# EAGLE board GrapherBlank5 (EAGLE 5.10), part 1 of 2
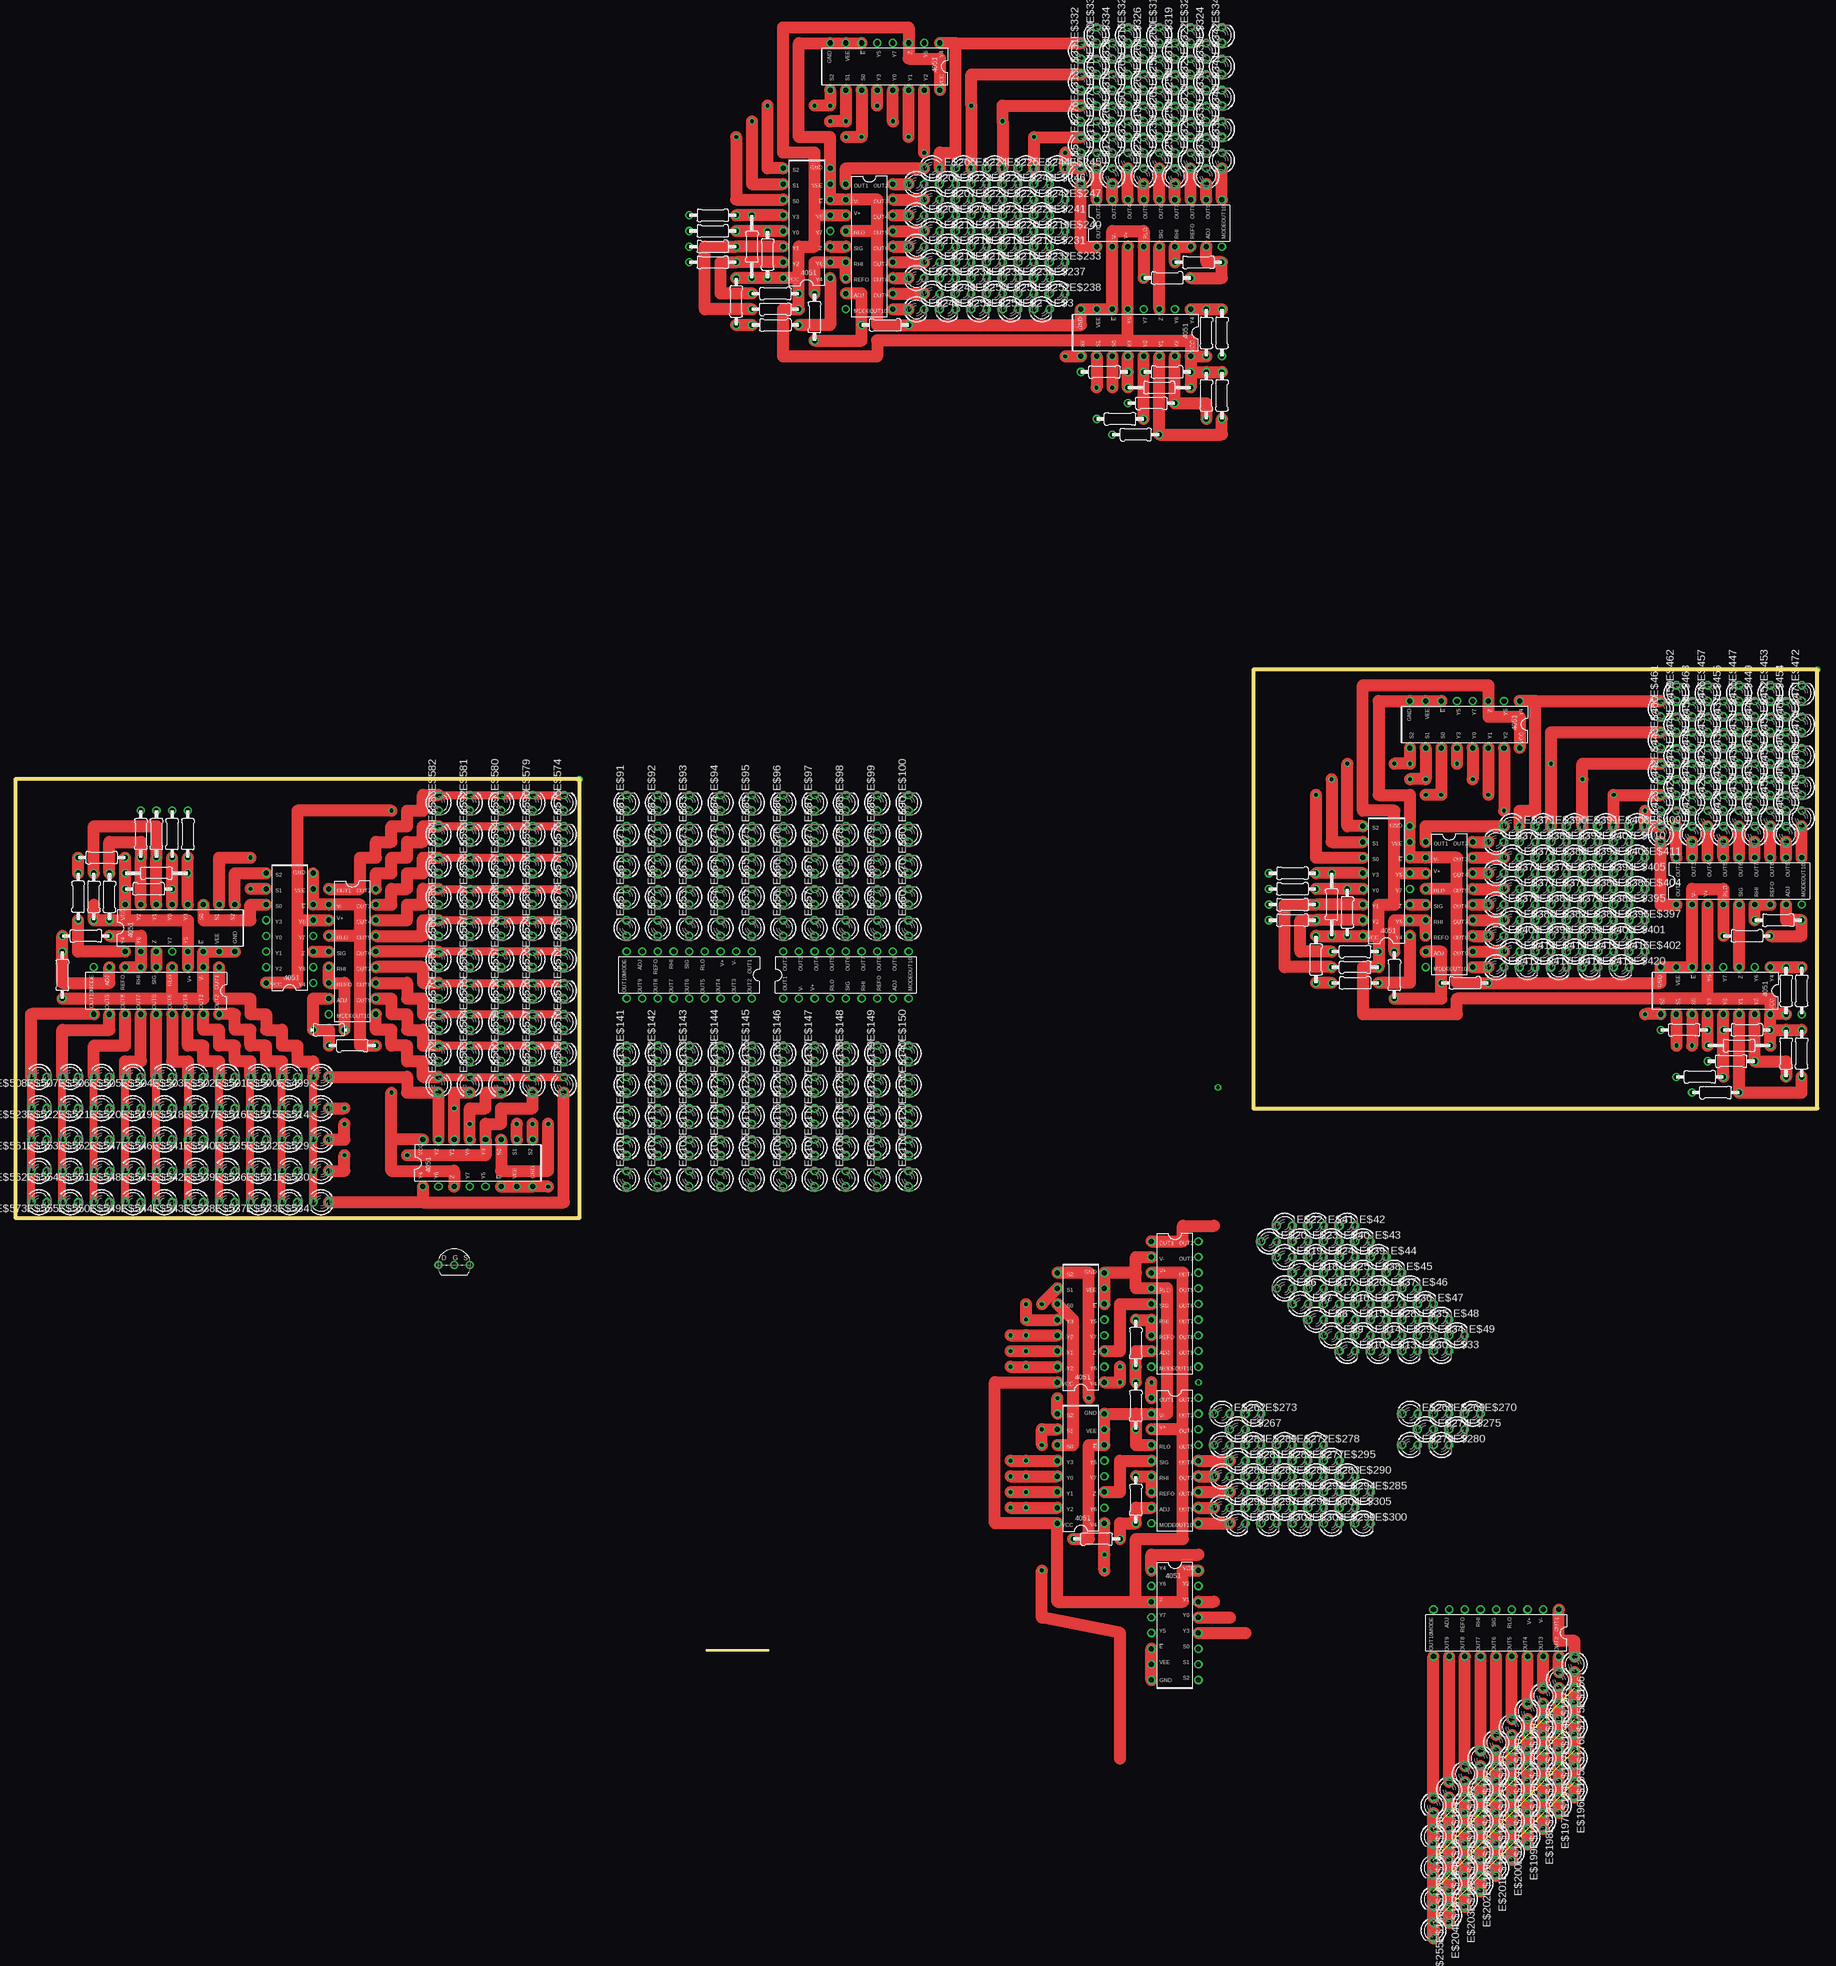
[diagram p0: board, top side]
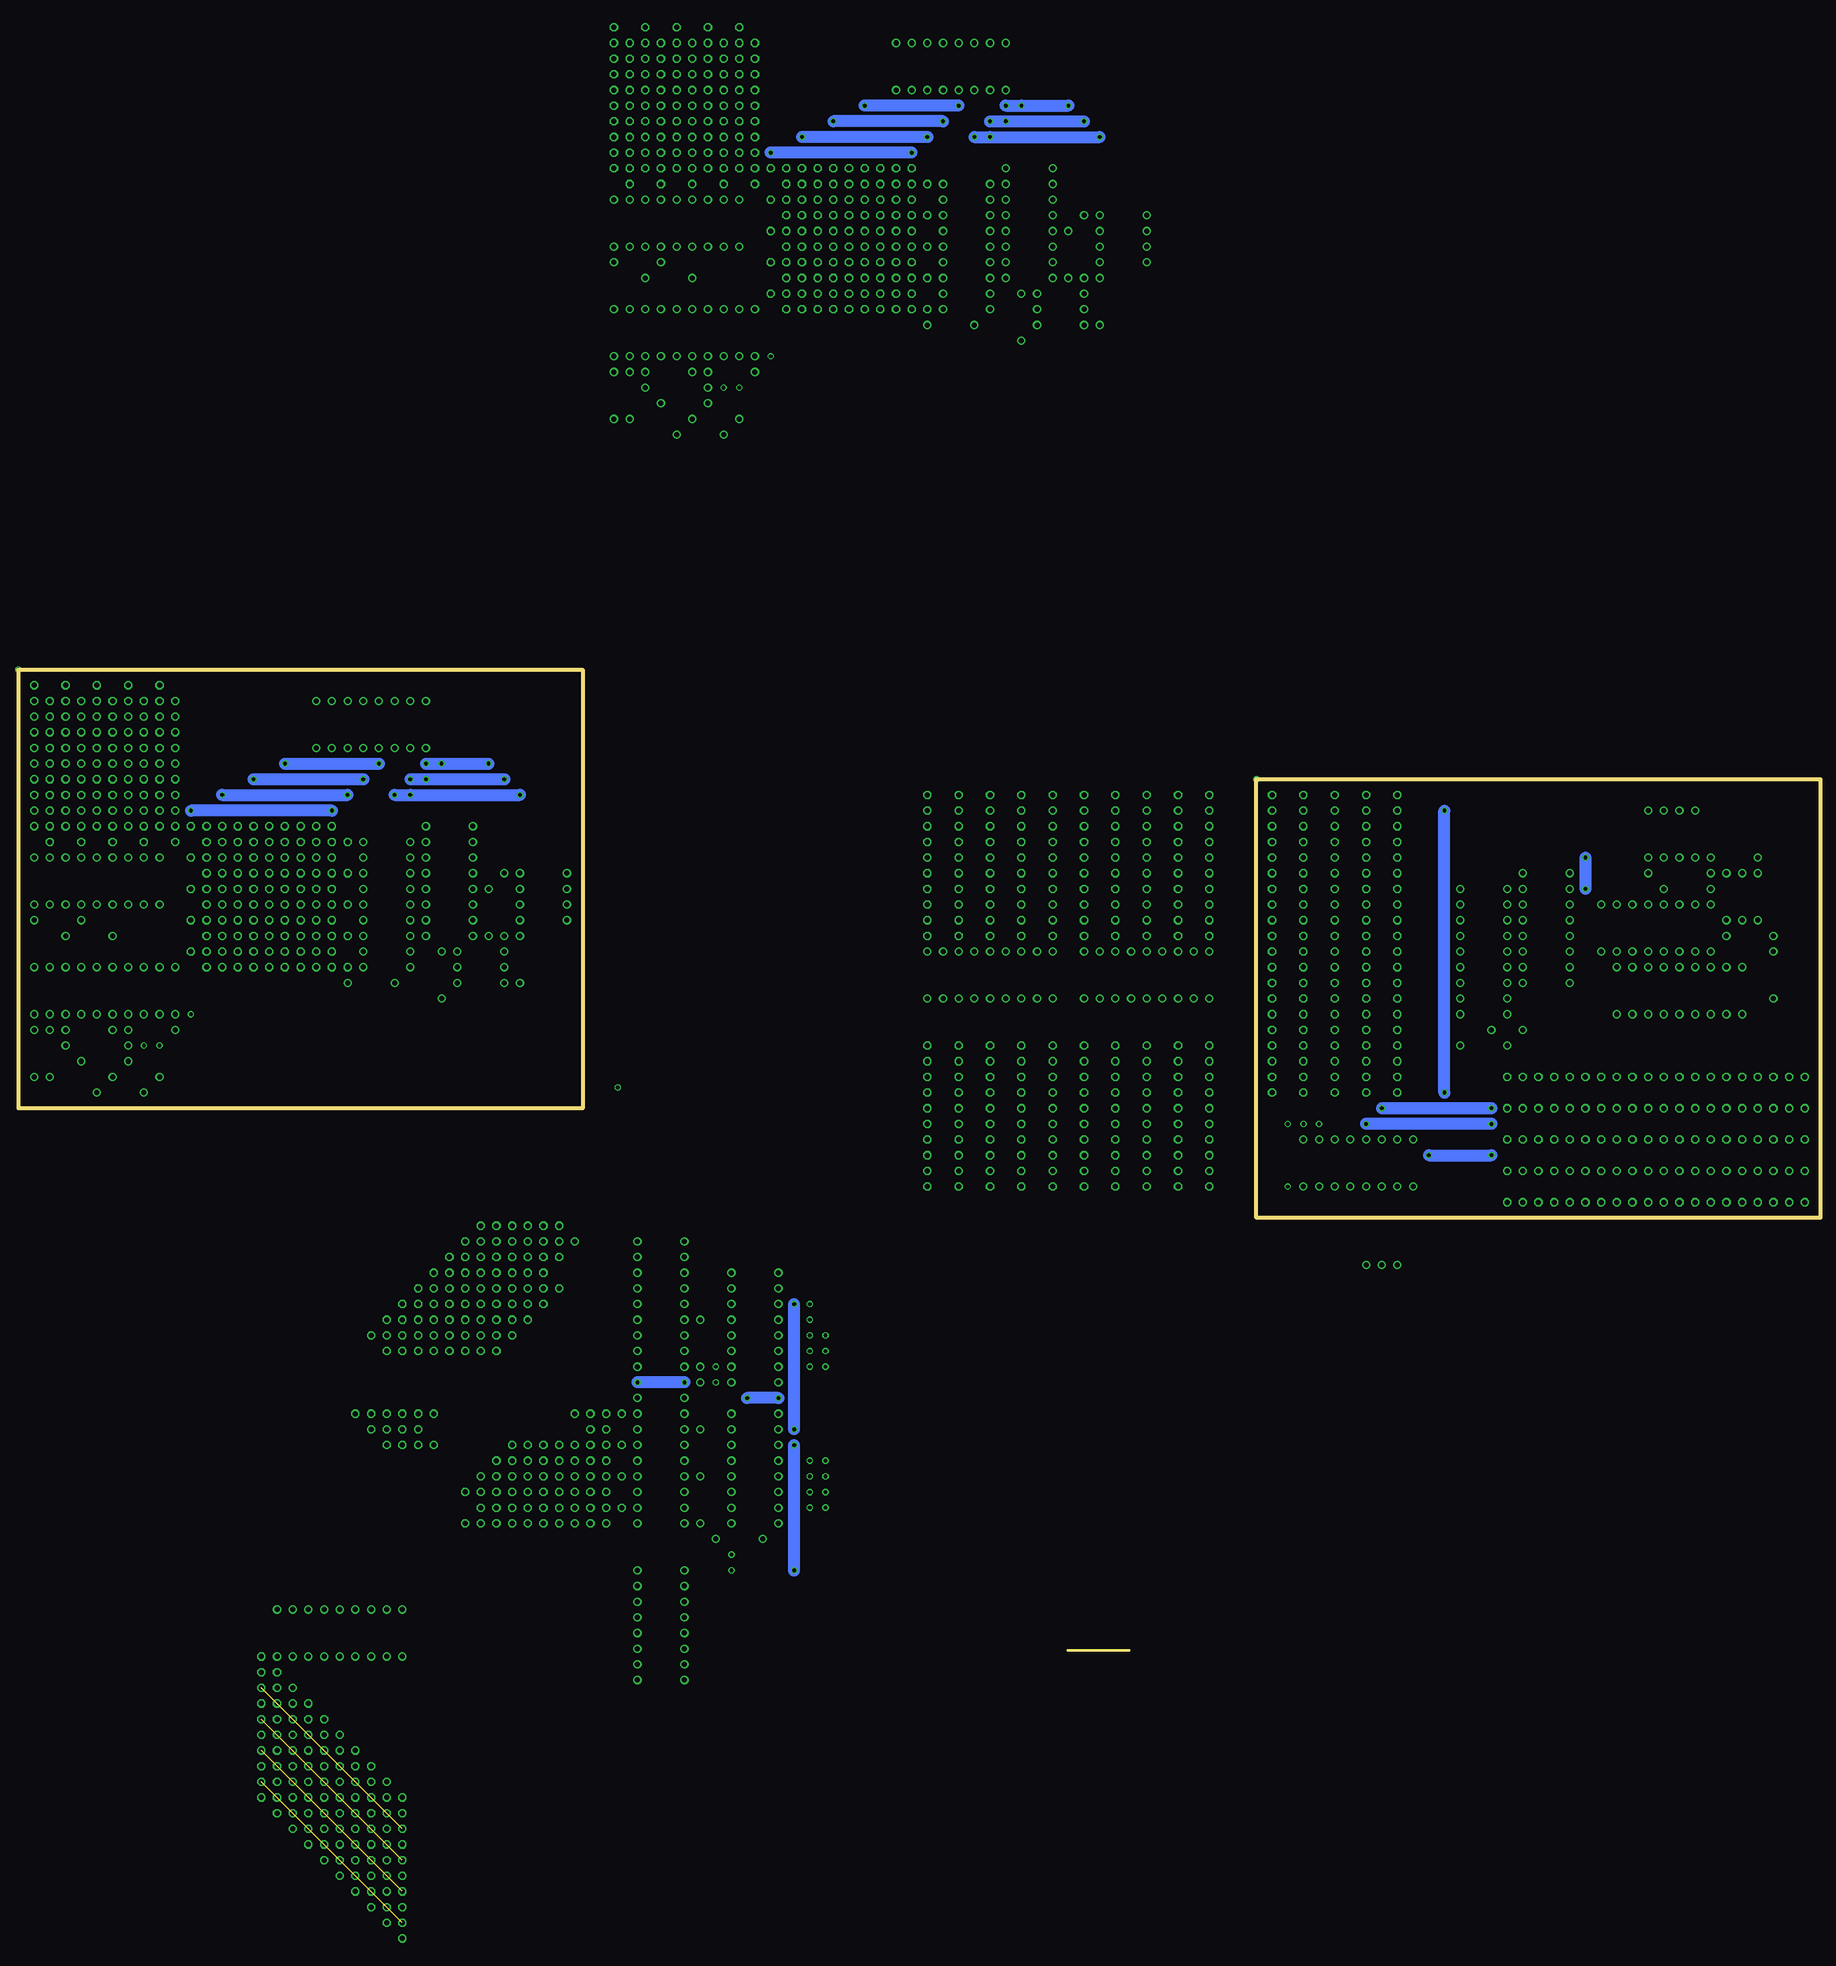
[diagram p1: board, bottom side, seen from below]

Size 292.1 x 88.9 mm. Coordinates in mm from the lower left corner, seen from the top.
Outline: 91.44,0 91.44,71.12 0,71.12 0,0 91.44,0
Outline: 292.1,17.78 292.1,88.9 200.66,88.9 200.66,17.78 292.1,17.78
Copper layers (1*16): Top 0.035mm / dielectric 1.5mm / Bottom 0.035mm
Design rules "default": minimum track width 10mil, minimum drill 24mil, track to track 8mil, track to pad 8mil, pad to pad 8mil, via to via 8mil, smd to smd 8mil, copper to edge 40mil, drill to drill 8mil, minimum pad ring 10mil, minimum via ring 8mil, stop-mask expansion 4mil, vias tented up to drill 0mil, thermal gap 10mil
Milling: 1 lines

## Footprints (pad centres in the part's own frame; a part is rotated, then mirrored left to right if it is on the bottom)
LM3914-10LED-BARGRAPH = drill 0.813 round: 1!R -3.81,1.27; 1!S -3.81,3.81; 1Q 3.81,1.27; 2!R -3.81,-3.81; 2!S -3.81,-6.35; 2Q 3.81,-8.89; 2Q1 3.81,-11.43; 2Q3 -3.81,-11.43; 3!R 3.81,-1.27; 3!S 3.81,-3.81; 3Q 3.81,-6.35; 4!R 3.81,3.81; 4!S 3.81,6.35; 4Q -3.81,8.89; GND -3.81,-8.89; NC -3.81,6.35; OE -3.81,-1.27; VCC 3.81,8.89
LED3MM = drill 0.813 octagon: A -1.27,0; K 1.27,0
RESISTOR = drill 0.813 round: IN1 -3.81,0; IN2 3.81,0
4051-ANALOG-MUX = drill 0.813 round: CLOCK 3.81,-6.35; GND -3.81,-8.89; Q0 3.81,-8.89; Q1 -3.81,-6.35; Q2 -3.81,-3.81; Q3 -3.81,-1.27; Q4 -3.81,3.81; Q5 -3.81,6.35; Q6 -3.81,1.27; Q7 3.81,1.27; Q8 3.81,-1.27; Q9 3.81,3.81; Q10 3.81,6.35; Q11 -3.81,8.89; RESET 3.81,-3.81; VCC 3.81,8.89
RESISTOR-L2 = drill 0.813 round: IN1 -5.08,0; IN2 5.08,0
RESISTOR-S2 = drill 0.813 round: IN1 -2.54,0; IN2 2.54,0
TRANSISTOR = drill 0.8 round: P$1 0,0; P$2 2.54,0; P$3 -2.54,0

## Placement (x,y rotation side)
E$1  [LM3914-10LED-BARGRAPH]  187.96,-12.7 0 top  (outside the outline)
E$2  [LED3MM]  not placed on the board
E$3  [LED3MM]  not placed on the board
E$4  [LM3914-10LED-BARGRAPH]  184.15,161.29 90 top  (outside the outline)
E$5  [LED3MM]  172.72,168.91 90 top  (outside the outline)
E$6  [LED3MM]  not placed on the board
E$7  [LED3MM]  not placed on the board
E$8  [LED3MM]  not placed on the board
E$9  [LED3MM]  not placed on the board
E$10  [LED3MM]  not placed on the board
E$11  [LED3MM]  175.26,171.45 90 top  (outside the outline)
E$12  [LED3MM]  177.8,168.91 90 top  (outside the outline)
E$13  [LED3MM]  not placed on the board
E$14  [LED3MM]  not placed on the board
E$15  [LED3MM]  not placed on the board
E$16  [LED3MM]  not placed on the board
E$17  [LED3MM]  not placed on the board
E$18  [LED3MM]  not placed on the board
E$19  [LED3MM]  not placed on the board
E$20  [LED3MM]  not placed on the board
E$21  [RESISTOR]  129.54,146.05 90 top  (outside the outline)
E$22  [LED3MM]  205.74,-1.27 0 top
E$23  [LED3MM]  not placed on the board
E$24  [LED3MM]  not placed on the board
E$25  [LED3MM]  not placed on the board
E$26  [LED3MM]  not placed on the board
E$27  [LED3MM]  not placed on the board
E$28  [LED3MM]  not placed on the board
E$29  [LED3MM]  not placed on the board
E$30  [LED3MM]  not placed on the board
E$31  [RESISTOR]  140.97,144.78 180 top  (outside the outline)
E$32  [LED3MM]  180.34,171.45 90 top  (outside the outline)
E$33  [LED3MM]  not placed on the board
E$34  [LED3MM]  not placed on the board
E$35  [LED3MM]  not placed on the board
E$36  [LED3MM]  not placed on the board
E$37  [LED3MM]  not placed on the board
E$38  [LED3MM]  not placed on the board
E$39  [LED3MM]  not placed on the board
E$40  [LED3MM]  not placed on the board
E$41  [LED3MM]  210.82,-1.27 0 top
E$42  [LED3MM]  215.9,-1.27 0 top
E$43  [LED3MM]  not placed on the board
E$44  [LED3MM]  not placed on the board
E$45  [LED3MM]  not placed on the board
E$46  [LED3MM]  not placed on the board
E$47  [LED3MM]  not placed on the board
E$48  [LED3MM]  not placed on the board
E$49  [LED3MM]  not placed on the board
E$50  [LED3MM]  not placed on the board
E$51  [LED3MM]  99.06,46.99 90 top
E$52  [LED3MM]  104.14,46.99 90 top
E$53  [LED3MM]  109.22,46.99 90 top
E$54  [LED3MM]  114.3,46.99 90 top
E$55  [LED3MM]  119.38,46.99 90 top
E$56  [LED3MM]  124.46,46.99 90 top
E$57  [LED3MM]  129.54,46.99 90 top
E$58  [LED3MM]  134.62,46.99 90 top
E$59  [LED3MM]  139.7,46.99 90 top
E$60  [LED3MM]  144.78,46.99 90 top
E$61  [LED3MM]  99.06,52.07 90 top
E$62  [LED3MM]  104.14,52.07 90 top
E$63  [LED3MM]  109.22,52.07 90 top
E$64  [LED3MM]  114.3,52.07 90 top
E$65  [LED3MM]  119.38,52.07 90 top
E$66  [LED3MM]  124.46,52.07 90 top
E$67  [LED3MM]  129.54,52.07 90 top
E$68  [LED3MM]  134.62,52.07 90 top
E$69  [LED3MM]  139.7,52.07 90 top
E$70  [LED3MM]  144.78,52.07 90 top
E$71  [LED3MM]  99.06,57.15 90 top
E$72  [LED3MM]  104.14,57.15 90 top
E$73  [LED3MM]  109.22,57.15 90 top
E$74  [LED3MM]  114.3,57.15 90 top
E$75  [LED3MM]  119.38,57.15 90 top
E$76  [LED3MM]  124.46,57.15 90 top
E$77  [LED3MM]  129.54,57.15 90 top
E$78  [LED3MM]  134.62,57.15 90 top
E$79  [LED3MM]  139.7,57.15 90 top
E$80  [LED3MM]  144.78,57.15 90 top
E$81  [LED3MM]  99.06,62.23 90 top
E$82  [LED3MM]  104.14,62.23 90 top
E$83  [LED3MM]  109.22,62.23 90 top
E$84  [LED3MM]  114.3,62.23 90 top
E$85  [LED3MM]  119.38,62.23 90 top
E$86  [LED3MM]  124.46,62.23 90 top
E$87  [LED3MM]  129.54,62.23 90 top
E$88  [LED3MM]  134.62,62.23 90 top
E$89  [LED3MM]  139.7,62.23 90 top
E$90  [LED3MM]  144.78,62.23 90 top
E$91  [LED3MM]  99.06,67.31 90 top
E$92  [LED3MM]  104.14,67.31 90 top
E$93  [LED3MM]  109.22,67.31 90 top
E$94  [LED3MM]  114.3,67.31 90 top
E$95  [LED3MM]  119.38,67.31 90 top
E$96  [LED3MM]  124.46,67.31 90 top
E$97  [LED3MM]  129.54,67.31 90 top
E$98  [LED3MM]  134.62,67.31 90 top
E$99  [LED3MM]  139.7,67.31 90 top
E$100  [LED3MM]  144.78,67.31 90 top
E$101  [LED3MM]  99.06,6.35 90 top
E$102  [LED3MM]  104.14,6.35 90 top
E$103  [LED3MM]  109.22,6.35 90 top
E$104  [LED3MM]  114.3,6.35 90 top
E$105  [LED3MM]  119.38,6.35 90 top
E$106  [LED3MM]  124.46,6.35 90 top
E$107  [LED3MM]  129.54,6.35 90 top
E$108  [LED3MM]  134.62,6.35 90 top
E$109  [LED3MM]  139.7,6.35 90 top
E$110  [LED3MM]  144.78,6.35 90 top
E$111  [LED3MM]  99.06,11.43 90 top
E$112  [LED3MM]  104.14,11.43 90 top
E$113  [LED3MM]  109.22,11.43 90 top
E$114  [LED3MM]  114.3,11.43 90 top
E$115  [LED3MM]  119.38,11.43 90 top
E$116  [LED3MM]  124.46,11.43 90 top
E$117  [LED3MM]  129.54,11.43 90 top
E$118  [LED3MM]  134.62,11.43 90 top
E$119  [LED3MM]  139.7,11.43 90 top
E$120  [LED3MM]  144.78,11.43 90 top
E$121  [LED3MM]  99.06,16.51 90 top
E$122  [LED3MM]  104.14,16.51 90 top
E$123  [LED3MM]  109.22,16.51 90 top
E$124  [LED3MM]  114.3,16.51 90 top
E$125  [LED3MM]  119.38,16.51 90 top
E$126  [LED3MM]  124.46,16.51 90 top
E$127  [LED3MM]  129.54,16.51 90 top
E$128  [LED3MM]  134.62,16.51 90 top
E$129  [LED3MM]  139.7,16.51 90 top
E$130  [LED3MM]  144.78,16.51 90 top
E$131  [LED3MM]  99.06,21.59 90 top
E$132  [LED3MM]  104.14,21.59 90 top
E$133  [LED3MM]  109.22,21.59 90 top
E$134  [LED3MM]  114.3,21.59 90 top
E$135  [LED3MM]  119.38,21.59 90 top
E$136  [LED3MM]  124.46,21.59 90 top
E$137  [LED3MM]  129.54,21.59 90 top
E$138  [LED3MM]  134.62,21.59 90 top
E$139  [LED3MM]  139.7,21.59 90 top
E$140  [LED3MM]  144.78,21.59 90 top
E$141  [LED3MM]  99.06,26.67 90 top
E$142  [LED3MM]  104.14,26.67 90 top
E$143  [LED3MM]  109.22,26.67 90 top
E$144  [LED3MM]  114.3,26.67 90 top
E$145  [LED3MM]  119.38,26.67 90 top
E$146  [LED3MM]  124.46,26.67 90 top
E$147  [LED3MM]  129.54,26.67 90 top
E$148  [LED3MM]  134.62,26.67 90 top
E$149  [LED3MM]  139.7,26.67 90 top
E$150  [LED3MM]  144.78,26.67 90 top
E$151  [LM3914-10LED-BARGRAPH]  133.35,39.37 90 top
E$152  [LM3914-10LED-BARGRAPH]  110.49,39.37 270 top
E$153  [LM3914-10LED-BARGRAPH]  138.43,158.75 0 top  (outside the outline)
E$154  [LED3MM]  not placed on the board
E$155  [LM3914-10LED-BARGRAPH]  241.3,-67.31 270 top  (outside the outline)
E$156  [LED3MM]  252.73,-72.39 270 top  (outside the outline)
E$157  [LED3MM]  250.19,-74.93 270 top  (outside the outline)
E$158  [LED3MM]  247.65,-77.47 270 top  (outside the outline)
E$159  [LED3MM]  245.11,-80.01 270 top  (outside the outline)
E$160  [LED3MM]  242.57,-82.55 270 top  (outside the outline)
E$161  [LED3MM]  240.03,-85.09 270 top  (outside the outline)
E$162  [LED3MM]  237.49,-87.63 270 top  (outside the outline)
E$163  [LED3MM]  234.95,-90.17 270 top  (outside the outline)
E$164  [LED3MM]  232.41,-92.71 270 top  (outside the outline)
E$165  [LED3MM]  229.87,-95.25 270 top  (outside the outline)
E$166  [LED3MM]  not placed on the board
E$167  [LED3MM]  232.41,-97.79 270 top  (outside the outline)
E$168  [LED3MM]  not placed on the board
E$169  [LED3MM]  not placed on the board
E$170  [LED3MM]  not placed on the board
E$171  [LED3MM]  not placed on the board
E$172  [LED3MM]  not placed on the board
E$173  [LED3MM]  not placed on the board
E$174  [LED3MM]  not placed on the board
E$175  [LED3MM]  not placed on the board
E$176  [LED3MM]  not placed on the board
E$177  [LED3MM]  not placed on the board
E$178  [LED3MM]  not placed on the board
E$179  [LED3MM]  not placed on the board
E$180  [LED3MM]  not placed on the board
E$181  [LED3MM]  not placed on the board
E$182  [LED3MM]  not placed on the board
E$183  [LED3MM]  not placed on the board
E$184  [LED3MM]  232.41,-102.87 270 top  (outside the outline)
E$185  [LED3MM]  not placed on the board
E$186  [LED3MM]  not placed on the board
E$187  [LED3MM]  232.41,-107.95 270 top  (outside the outline)
E$188  [LED3MM]  not placed on the board
E$189  [LED3MM]  not placed on the board
E$190  [LED3MM]  not placed on the board
E$191  [LED3MM]  not placed on the board
E$192  [LED3MM]  not placed on the board
E$193  [LED3MM]  not placed on the board
E$194  [LED3MM]  not placed on the board
E$195  [LED3MM]  not placed on the board
E$196  [LED3MM]  252.73,-92.71 270 top  (outside the outline)
E$197  [LED3MM]  250.19,-95.25 270 top  (outside the outline)
E$198  [LED3MM]  247.65,-97.79 270 top  (outside the outline)
E$199  [LED3MM]  245.11,-100.33 270 top  (outside the outline)
E$200  [LED3MM]  242.57,-102.87 270 top  (outside the outline)
E$201  [LED3MM]  240.03,-105.41 270 top  (outside the outline)
E$202  [LED3MM]  237.49,-107.95 270 top  (outside the outline)
E$203  [LED3MM]  234.95,-110.49 270 top  (outside the outline)
E$204  [LED3MM]  232.41,-113.03 270 top  (outside the outline)
E$205  [LED3MM]  148.59,170.18 0 top  (outside the outline)
E$206  [LED3MM]  146.05,167.64 0 top  (outside the outline)
E$207  [LED3MM]  148.59,165.1 0 top  (outside the outline)
E$208  [LED3MM]  146.05,162.56 0 top  (outside the outline)
E$209  [LED3MM]  not placed on the board
E$210  [LED3MM]  not placed on the board
E$211  [LED3MM]  148.59,160.02 0 top  (outside the outline)
E$212  [LED3MM]  146.05,157.48 0 top  (outside the outline)
E$213  [LED3MM]  not placed on the board
E$214  [LED3MM]  148.59,154.94 0 top  (outside the outline)
E$215  [LED3MM]  not placed on the board
E$216  [LED3MM]  not placed on the board
E$217  [LED3MM]  not placed on the board
E$218  [LED3MM]  not placed on the board
E$219  [LED3MM]  not placed on the board
E$220  [LED3MM]  not placed on the board
E$221  [LED3MM]  not placed on the board
E$222  [LED3MM]  not placed on the board
E$223  [LED3MM]  not placed on the board
E$224  [LED3MM]  153.67,170.18 0 top  (outside the outline)
E$225  [LED3MM]  158.75,170.18 0 top  (outside the outline)
E$226  [LED3MM]  not placed on the board
E$227  [LED3MM]  not placed on the board
E$228  [LED3MM]  not placed on the board
E$229  [LED3MM]  182.88,168.91 90 top  (outside the outline)
E$230  [LED3MM]  185.42,171.45 90 top  (outside the outline)
E$231  [LED3MM]  not placed on the board
E$232  [LED3MM]  not placed on the board
E$233  [LED3MM]  not placed on the board
E$234  [LED3MM]  not placed on the board
E$235  [LED3MM]  not placed on the board
E$236  [LED3MM]  not placed on the board
E$237  [LED3MM]  not placed on the board
E$238  [LED3MM]  not placed on the board
E$239  [LED3MM]  146.05,152.4 0 top  (outside the outline)
E$240  [LED3MM]  not placed on the board
E$241  [LED3MM]  not placed on the board
E$242  [LED3MM]  not placed on the board
E$243  [LED3MM]  not placed on the board
E$244  [LED3MM]  163.83,170.18 0 top  (outside the outline)
E$245  [LED3MM]  168.91,170.18 0 top  (outside the outline)
E$246  [LED3MM]  not placed on the board
E$247  [LED3MM]  not placed on the board
E$248  [LED3MM]  146.05,147.32 0 top  (outside the outline)
E$249  [LED3MM]  148.59,149.86 0 top  (outside the outline)
E$250  [LED3MM]  not placed on the board
E$251  [LED3MM]  not placed on the board
E$252  [LED3MM]  not placed on the board
E$253  [LED3MM]  not placed on the board
E$254  [LED3MM]  not placed on the board
E$255  [LED3MM]  229.87,-115.57 270 top  (outside the outline)
E$256  [LED3MM]  not placed on the board
E$257  [LED3MM]  187.96,168.91 90 top  (outside the outline)
E$258  [LED3MM]  not placed on the board
E$259  [LED3MM]  not placed on the board
E$260  [LED3MM]  not placed on the board
E$261  [LED3MM]  not placed on the board
E$262  [LED3MM]  not placed on the board
E$263  [LED3MM]  not placed on the board
E$264  [LED3MM]  not placed on the board
E$265  [LED3MM]  not placed on the board
E$266  [LED3MM]  not placed on the board
E$267  [LED3MM]  not placed on the board
E$268  [LED3MM]  not placed on the board
E$269  [LED3MM]  not placed on the board
E$270  [LED3MM]  not placed on the board
E$271  [LED3MM]  not placed on the board
E$272  [LED3MM]  not placed on the board
E$273  [LED3MM]  not placed on the board
E$274  [LED3MM]  not placed on the board
E$275  [LED3MM]  not placed on the board
E$276  [LED3MM]  172.72,173.99 90 top  (outside the outline)
E$277  [LED3MM]  not placed on the board
E$278  [LED3MM]  not placed on the board
E$279  [LED3MM]  not placed on the board
E$280  [LED3MM]  not placed on the board
E$281  [LED3MM]  198.12,-39.37 0 top  (outside the outline)
E$282  [LED3MM]  not placed on the board
E$283  [LED3MM]  not placed on the board
E$284  [LED3MM]  not placed on the board
E$285  [LED3MM]  not placed on the board
E$286  [LED3MM]  195.58,-41.91 0 top  (outside the outline)
E$287  [LED3MM]  not placed on the board
E$288  [LED3MM]  not placed on the board
E$289  [LED3MM]  not placed on the board
E$290  [LED3MM]  not placed on the board
E$291  [LED3MM]  198.12,-44.45 0 top  (outside the outline)
E$292  [LED3MM]  not placed on the board
E$293  [LED3MM]  not placed on the board
E$294  [LED3MM]  not placed on the board
E$295  [LED3MM]  not placed on the board
E$296  [LED3MM]  195.58,-46.99 0 top  (outside the outline)
E$297  [LED3MM]  not placed on the board
E$298  [LED3MM]  not placed on the board
E$299  [LED3MM]  not placed on the board
E$300  [LED3MM]  not placed on the board
E$301  [LED3MM]  198.12,-49.53 0 top  (outside the outline)
E$302  [LED3MM]  not placed on the board
E$303  [LED3MM]  not placed on the board
E$304  [LED3MM]  not placed on the board
E$305  [LED3MM]  not placed on the board
E$306  [LM3914-10LED-BARGRAPH]  187.96,-38.1 0 top  (outside the outline)
E$307  [4051-ANALOG-MUX]  172.72,-40.64 180 top  (outside the outline)
E$308  [RESISTOR]  181.61,-45.72 90 top  (outside the outline)
E$309  [RESISTOR]  175.26,-52.07 0 top  (outside the outline)
E$310  [RESISTOR]  181.61,-20.32 90 top  (outside the outline)
E$311  [RESISTOR]  181.61,-30.48 90 top  (outside the outline)
E$312  [4051-ANALOG-MUX]  172.72,-17.78 180 top  (outside the outline)
E$313  [LED3MM]  172.72,179.07 90 top  (outside the outline)
E$314  [LED3MM]  not placed on the board
E$315  [LED3MM]  not placed on the board
E$316  [LED3MM]  not placed on the board
E$317  [LED3MM]  not placed on the board
E$318  [LED3MM]  not placed on the board
E$319  [LED3MM]  not placed on the board
E$320  [LED3MM]  not placed on the board
E$321  [LED3MM]  not placed on the board
E$322  [LED3MM]  not placed on the board
E$323  [LED3MM]  not placed on the board
E$324  [LED3MM]  not placed on the board
E$325  [LED3MM]  190.5,171.45 90 top  (outside the outline)
E$326  [LED3MM]  not placed on the board
E$327  [LED3MM]  not placed on the board
E$328  [LED3MM]  not placed on the board
E$329  [4051-ANALOG-MUX]  187.96,-66.04 0 top  (outside the outline)
E$330  [LED3MM]  not placed on the board
E$331  [LED3MM]  172.72,184.15 90 top  (outside the outline)
E$332  [LED3MM]  172.72,189.23 90 top  (outside the outline)
E$333  [LED3MM]  not placed on the board
E$334  [LED3MM]  not placed on the board
E$335  [LED3MM]  195.58,171.45 90 top  (outside the outline)
E$336  [LED3MM]  193.04,168.91 90 top  (outside the outline)
E$337  [LED3MM]  not placed on the board
E$338  [LED3MM]  not placed on the board
E$339  [LED3MM]  not placed on the board
E$340  [LED3MM]  not placed on the board
E$341  [LED3MM]  not placed on the board
E$342  [LED3MM]  not placed on the board
E$343  [LED3MM]  not placed on the board
E$344  [RESISTOR]  191.77,154.94 180 top  (outside the outline)
E$345  [RESISTOR]  186.69,152.4 180 top  (outside the outline)
E$346  [4051-ANALOG-MUX]  128.27,161.29 180 top  (outside the outline)
E$347  [4051-ANALOG-MUX]  181.61,143.51 270 top  (outside the outline)
E$348  [4051-ANALOG-MUX]  not placed on the board
E$349  [RESISTOR]  113.03,154.94 180 top  (outside the outline)
E$350  [RESISTOR]  113.03,157.48 180 top  (outside the outline)
E$351  [RESISTOR]  113.03,160.02 180 top  (outside the outline)
E$352  [RESISTOR]  113.03,162.56 180 top  (outside the outline)
E$353  [RESISTOR]  123.19,144.78 180 top  (outside the outline)
E$354  [RESISTOR]  121.92,156.21 270 top  (outside the outline)
E$355  [RESISTOR]  123.19,149.86 0 top  (outside the outline)
E$356  [RESISTOR]  123.19,147.32 0 top  (outside the outline)
E$357  [RESISTOR-L2]  119.38,157.48 90 top  (outside the outline)
E$358  [RESISTOR]  116.84,148.59 270 top  (outside the outline)
E$359  [RESISTOR]  179.07,129.54 0 top  (outside the outline)
E$360  [RESISTOR]  181.61,127 0 top  (outside the outline)
E$361  [RESISTOR]  184.15,132.08 0 top  (outside the outline)
E$362  [RESISTOR]  176.53,137.16 0 top  (outside the outline)
E$363  [RESISTOR-L2]  185.42,134.62 180 top  (outside the outline)
E$364  [RESISTOR]  186.69,137.16 180 top  (outside the outline)
E$365  [RESISTOR]  193.04,133.35 270 top  (outside the outline)
E$366  [RESISTOR]  195.58,133.35 270 top  (outside the outline)
E$367  [4051-ANALOG-MUX]  140.97,186.69 270 top  (outside the outline)
E$368  [RESISTOR]  193.04,143.51 270 top  (outside the outline)
E$369  [RESISTOR]  195.58,143.51 270 top  (outside the outline)
E$370  [LM3914-10LED-BARGRAPH]  232.41,52.07 0 top
E$371  [LED3MM]  242.57,63.5 0 top
E$372  [LED3MM]  240.03,60.96 0 top
E$373  [LED3MM]  242.57,58.42 0 top
E$374  [LED3MM]  240.03,55.88 0 top
E$375  [LED3MM]  245.11,55.88 0 top
E$376  [LED3MM]  247.65,53.34 0 top
E$377  [LED3MM]  242.57,53.34 0 top
E$378  [LED3MM]  240.03,50.8 0 top
E$379  [LED3MM]  250.19,50.8 0 top
E$380  [LED3MM]  242.57,48.26 0 top
E$381  [LED3MM]  252.73,48.26 0 top
E$382  [LED3MM]  247.65,48.26 0 top
E$383  [LED3MM]  255.27,50.8 0 top
E$384  [LED3MM]  245.11,50.8 0 top
E$385  [LED3MM]  257.81,53.34 0 top
E$386  [LED3MM]  252.73,53.34 0 top
E$387  [LED3MM]  250.19,55.88 0 top
E$388  [LED3MM]  247.65,58.42 0 top
E$389  [LED3MM]  245.11,60.96 0 top
E$390  [LED3MM]  247.65,63.5 0 top
E$391  [LED3MM]  252.73,63.5 0 top
E$392  [LED3MM]  250.19,60.96 0 top
E$393  [LED3MM]  252.73,58.42 0 top
E$394  [LED3MM]  255.27,55.88 0 top
E$395  [LED3MM]  260.35,50.8 0 top
E$396  [LED3MM]  257.81,48.26 0 top
E$397  [LED3MM]  262.89,48.26 0 top
E$398  [LED3MM]  245.11,45.72 0 top
E$399  [LED3MM]  250.19,45.72 0 top
E$400  [LED3MM]  255.27,45.72 0 top
E$401  [LED3MM]  260.35,45.72 0 top
E$402  [LED3MM]  262.89,43.18 0 top
E$403  [LED3MM]  240.03,45.72 0 top
E$404  [LED3MM]  262.89,53.34 0 top
E$405  [LED3MM]  260.35,55.88 0 top
E$406  [LED3MM]  257.81,58.42 0 top
E$407  [LED3MM]  255.27,60.96 0 top
E$408  [LED3MM]  257.81,63.5 0 top
E$409  [LED3MM]  262.89,63.5 0 top
E$410  [LED3MM]  260.35,60.96 0 top
E$411  [LED3MM]  262.89,58.42 0 top
E$412  [LED3MM]  240.03,40.64 0 top
E$413  [LED3MM]  242.57,43.18 0 top
E$414  [LED3MM]  247.65,43.18 0 top
E$415  [LED3MM]  252.73,43.18 0 top
E$416  [LED3MM]  257.81,43.18 0 top
E$417  [LED3MM]  245.11,40.64 0 top
E$418  [LED3MM]  250.19,40.64 0 top
E$419  [LED3MM]  255.27,40.64 0 top
E$420  [LED3MM]  260.35,40.64 0 top
E$421  [4051-ANALOG-MUX]  222.25,54.61 180 top
E$422  [LM3914-10LED-BARGRAPH]  278.13,54.61 90 top
E$423  [LED3MM]  266.7,62.23 90 top
E$424  [LED3MM]  269.24,64.77 90 top
E$425  [LED3MM]  271.78,62.23 90 top
E$426  [LED3MM]  274.32,64.77 90 top
E$427  [LED3MM]  274.32,69.85 90 top
E$428  [LED3MM]  276.86,67.31 90 top
E$429  [LED3MM]  276.86,62.23 90 top
E$430  [LED3MM]  279.4,64.77 90 top
E$431  [LED3MM]  279.4,74.93 90 top
E$432  [LED3MM]  281.94,62.23 90 top
E$433  [LED3MM]  281.94,72.39 90 top
E$434  [LED3MM]  281.94,67.31 90 top
E$435  [LED3MM]  279.4,80.01 90 top
E$436  [LED3MM]  279.4,69.85 90 top
E$437  [LED3MM]  276.86,77.47 90 top
E$438  [LED3MM]  276.86,72.39 90 top
E$439  [LED3MM]  274.32,74.93 90 top
E$440  [LED3MM]  271.78,67.31 90 top
E$441  [LED3MM]  269.24,69.85 90 top
E$442  [LED3MM]  266.7,67.31 90 top
E$443  [LED3MM]  266.7,72.39 90 top
E$444  [LED3MM]  269.24,74.93 90 top
E$445  [LED3MM]  271.78,72.39 90 top
E$446  [LED3MM]  274.32,80.01 90 top
E$447  [LED3MM]  279.4,85.09 90 top
E$448  [LED3MM]  281.94,77.47 90 top
E$449  [LED3MM]  281.94,82.55 90 top
E$450  [LED3MM]  284.48,69.85 90 top
E$451  [LED3MM]  284.48,74.93 90 top
E$452  [LED3MM]  284.48,80.01 90 top
E$453  [LED3MM]  284.48,85.09 90 top
E$454  [LED3MM]  287.02,82.55 90 top
E$455  [LED3MM]  284.48,64.77 90 top
E$456  [LED3MM]  276.86,82.55 90 top
E$457  [LED3MM]  274.32,85.09 90 top
E$458  [LED3MM]  271.78,77.47 90 top
E$459  [LED3MM]  269.24,80.01 90 top
E$460  [LED3MM]  266.7,77.47 90 top
E$461  [LED3MM]  266.7,82.55 90 top
E$462  [LED3MM]  269.24,85.09 90 top
E$463  [LED3MM]  271.78,82.55 90 top
E$464  [LED3MM]  289.56,64.77 90 top
E$465  [LED3MM]  287.02,62.23 90 top
E$466  [LED3MM]  287.02,67.31 90 top
E$467  [LED3MM]  287.02,72.39 90 top
E$468  [LED3MM]  287.02,77.47 90 top
E$469  [LED3MM]  289.56,69.85 90 top
E$470  [LED3MM]  289.56,74.93 90 top
E$471  [LED3MM]  289.56,80.01 90 top
E$472  [LED3MM]  289.56,85.09 90 top
E$473  [RESISTOR]  285.75,48.26 180 top
E$474  [RESISTOR]  280.67,45.72 180 top
E$475  [4051-ANALOG-MUX]  275.59,36.83 270 top
E$476  [RESISTOR]  223.52,39.37 90 top
E$477  [RESISTOR]  234.95,38.1 180 top
E$478  [RESISTOR]  207.01,48.26 180 top
E$479  [RESISTOR]  207.01,50.8 180 top
E$480  [RESISTOR]  207.01,53.34 180 top
E$481  [RESISTOR]  207.01,55.88 180 top
E$482  [RESISTOR]  217.17,38.1 180 top
E$483  [RESISTOR]  215.9,49.53 270 top
E$484  [RESISTOR]  217.17,43.18 0 top
E$485  [RESISTOR]  217.17,40.64 0 top
E$486  [RESISTOR-L2]  213.36,50.8 90 top
E$487  [RESISTOR]  210.82,41.91 270 top
E$488  [RESISTOR]  273.05,22.86 0 top
E$489  [RESISTOR]  275.59,20.32 0 top
E$490  [RESISTOR]  278.13,25.4 0 top
E$491  [RESISTOR]  270.51,30.48 0 top
E$492  [RESISTOR-L2]  279.4,27.94 180 top
E$493  [RESISTOR]  280.67,30.48 180 top
E$494  [RESISTOR]  287.02,26.67 270 top
E$495  [RESISTOR]  289.56,26.67 270 top
E$496  [4051-ANALOG-MUX]  234.95,80.01 270 top
E$497  [RESISTOR]  287.02,36.83 270 top
E$498  [RESISTOR]  289.56,36.83 270 top
E$499  [LED3MM]  49.53,22.86 180 top
E$500  [LED3MM]  44.45,22.86 180 top
E$501  [LED3MM]  39.37,22.86 180 top
E$502  [LED3MM]  34.29,22.86 180 top
E$503  [LED3MM]  29.21,22.86 180 top
E$504  [LED3MM]  24.13,22.86 180 top
E$505  [LED3MM]  19.05,22.86 180 top
E$506  [LED3MM]  13.97,22.86 180 top
E$507  [LED3MM]  8.89,22.86 180 top
E$508  [LED3MM]  3.81,22.86 180 top
E$509  [LED3MM]  88.9,21.59 90 top
E$510  [LED3MM]  88.9,26.67 90 top
E$511  [LED3MM]  88.9,31.75 90 top
E$512  [LED3MM]  88.9,36.83 90 top
E$513  [LED3MM]  88.9,41.91 90 top
E$514  [LED3MM]  49.53,17.78 180 top
E$515  [LED3MM]  44.45,17.78 180 top
E$516  [LED3MM]  39.37,17.78 180 top
E$517  [LED3MM]  34.29,17.78 180 top
E$518  [LED3MM]  29.21,17.78 180 top
E$519  [LED3MM]  24.13,17.78 180 top
E$520  [LED3MM]  19.05,17.78 180 top
E$521  [LED3MM]  13.97,17.78 180 top
E$522  [LED3MM]  8.89,17.78 180 top
E$523  [LED3MM]  3.81,17.78 180 top
E$524  [LED3MM]  83.82,41.91 90 top
E$525  [LED3MM]  83.82,36.83 90 top
E$526  [LED3MM]  83.82,31.75 90 top
E$527  [LED3MM]  83.82,26.67 90 top
E$528  [LED3MM]  83.82,21.59 90 top
E$529  [LED3MM]  49.53,12.7 180 top
E$530  [LED3MM]  49.53,7.62 180 top
E$531  [LED3MM]  44.45,7.62 180 top
E$532  [LED3MM]  44.45,12.7 180 top
E$533  [LED3MM]  44.45,2.54 180 top
E$534  [LED3MM]  49.53,2.54 180 top
E$535  [LED3MM]  39.37,12.7 180 top
E$536  [LED3MM]  39.37,7.62 180 top
E$537  [LED3MM]  39.37,2.54 180 top
E$538  [LED3MM]  34.29,2.54 180 top
E$539  [LED3MM]  34.29,7.62 180 top
E$540  [LED3MM]  34.29,12.7 180 top
E$541  [LED3MM]  29.21,12.7 180 top
E$542  [LED3MM]  29.21,7.62 180 top
E$543  [LED3MM]  29.21,2.54 180 top
E$544  [LED3MM]  24.13,2.54 180 top
E$545  [LED3MM]  24.13,7.62 180 top
E$546  [LED3MM]  24.13,12.7 180 top
E$547  [LED3MM]  19.05,12.7 180 top
E$548  [LED3MM]  19.05,7.62 180 top
E$549  [LED3MM]  19.05,2.54 180 top
E$550  [LED3MM]  13.97,2.54 180 top
E$551  [LED3MM]  13.97,7.62 180 top
E$552  [LED3MM]  13.97,12.7 180 top
E$553  [LED3MM]  8.89,12.7 180 top
E$554  [LED3MM]  8.89,7.62 180 top
E$555  [LED3MM]  8.89,2.54 180 top
E$556  [LED3MM]  78.74,41.91 90 top
E$557  [LED3MM]  78.74,36.83 90 top
E$558  [LED3MM]  78.74,31.75 90 top
E$559  [LED3MM]  78.74,26.67 90 top
E$560  [LED3MM]  78.74,21.59 90 top
E$561  [LED3MM]  3.81,12.7 180 top
E$562  [LED3MM]  3.81,7.62 180 top
E$563  [LED3MM]  73.66,21.59 90 top
E$564  [LED3MM]  73.66,26.67 90 top
E$565  [LED3MM]  73.66,31.75 90 top
E$566  [LED3MM]  73.66,36.83 90 top
E$567  [LED3MM]  73.66,41.91 90 top
E$568  [LED3MM]  68.58,41.91 90 top
E$569  [LED3MM]  68.58,36.83 90 top
E$570  [LED3MM]  68.58,31.75 90 top
E$571  [LED3MM]  68.58,26.67 90 top
E$572  [LED3MM]  68.58,21.59 90 top
E$573  [LED3MM]  3.81,2.54 180 top
E$574  [LED3MM]  88.9,67.31 90 top
E$575  [LED3MM]  88.9,62.23 90 top
E$576  [LED3MM]  88.9,57.15 90 top
E$577  [LED3MM]  88.9,52.07 90 top
E$578  [LED3MM]  88.9,46.99 90 top
E$579  [LED3MM]  83.82,67.31 90 top
E$580  [LED3MM]  78.74,67.31 90 top
E$581  [LED3MM]  73.66,67.31 90 top
E$582  [LED3MM]  68.58,67.31 90 top
E$583  [LED3MM]  68.58,62.23 90 top
E$584  [LED3MM]  68.58,57.15 90 top
E$585  [LED3MM]  68.58,52.07 90 top
E$586  [LED3MM]  68.58,46.99 90 top
E$587  [LED3MM]  73.66,46.99 90 top
E$588  [LED3MM]  78.74,46.99 90 top
E$589  [LED3MM]  83.82,46.99 90 top
E$590  [LED3MM]  83.82,62.23 90 top
E$591  [LED3MM]  78.74,62.23 90 top
E$592  [LED3MM]  73.66,62.23 90 top
E$593  [LED3MM]  73.66,57.15 90 top
E$594  [LED3MM]  78.74,57.15 90 top
E$595  [LED3MM]  83.82,57.15 90 top
E$596  [LED3MM]  83.82,52.07 90 top
E$597  [LED3MM]  78.74,52.07 90 top
E$598  [LED3MM]  73.66,52.07 90 top
E$599  [LM3914-10LED-BARGRAPH]  24.13,36.83 270 top
E$600  [4051-ANALOG-MUX]  26.67,46.99 90 top
E$601  [RESISTOR]  11.43,45.72 0 top
E$602  [RESISTOR]  7.62,39.37 90 top
E$603  [RESISTOR]  20.32,62.23 90 top
E$604  [RESISTOR]  22.86,62.23 90 top
E$605  [RESISTOR]  25.4,62.23 90 top
E$606  [RESISTOR]  27.94,62.23 90 top
E$607  [RESISTOR]  10.16,52.07 90 top
E$608  [RESISTOR]  21.59,53.34 180 top
E$609  [RESISTOR]  15.24,52.07 270 top
E$610  [RESISTOR]  12.7,52.07 270 top
E$611  [RESISTOR-L2]  22.86,55.88 0 top
E$612  [RESISTOR]  13.97,58.42 180 top
E$613  [LM3914-10LED-BARGRAPH]  54.61,44.45 0 top
E$614  [4051-ANALOG-MUX]  44.45,46.99 180 top
E$615  [RESISTOR-S2]  50.8,30.48 180 top
E$616  [RESISTOR]  54.61,27.94 0 top
E$617  [4051-ANALOG-MUX]  74.93,8.89 90 top
E$618  [TRANSISTOR]  not placed on the board

## Library data of the parts
E$1 E$4 E$21 E$31 E$151-E$153 E$155 E$306-E$312 E$329 E$344-E$370 E$421 E$422 E$473-E$498 E$599-E$618 = RussellLibrary
E$2 E$3 E$5-E$20 E$22-E$30 E$32-E$150 E$154 E$156-E$305 E$313-E$328 E$330-E$343 E$371-E$420 E$423-E$472 E$499-E$598 = led

## Nets
GND: E$1.1!R E$1.NC E$306.1!R E$306.NC E$307.GND E$307.Q1 E$307.Q2 E$309.IN1 E$311.IN1 E$312.GND E$312.Q1 E$312.Q2
S$1: E$153.2Q1 E$248.A
S$2: E$153.2Q E$249.A
S$3: E$153.3Q E$239.A
S$4: E$153.3!S E$214.A
S$5: E$153.3!R E$212.A
S$6: E$153.1Q E$211.A
S$7: E$153.4!R E$208.A
S$8: E$153.4!S E$207.A
S$9: E$153.VCC E$206.A
S$10: E$153.4Q E$205.A
S$11: E$4.2Q1 E$335.A
S$12: E$4.2Q E$336.A
S$13: E$4.3Q E$325.A
S$15: E$4.3!S E$257.A
S$16: E$307.Q11
S$17: E$1.1!S E$306.1!S E$307.VCC E$312.VCC E$329.VCC
S$18: E$312.Q11
S$19: E$329.Q11
S$20: E$4.3!R E$230.A
S$21: E$4.1Q E$229.A
S$22: E$306.OE E$307.Q4
S$23: E$306.2!R E$306.2!S E$308.IN2
S$24: E$306.GND E$308.IN1 E$309.IN2
S$26: E$4.4!R E$32.A
S$27: E$346.Q0 E$367.Q0
S$28: E$1.2!R E$1.2!S E$310.IN2
S$29: E$4.1!S E$153.1!S E$346.VCC E$347.VCC E$354.IN2 E$356.IN2 E$357.IN1 E$358.IN1 E$363.IN1 E$364.IN1 E$365.IN1 E$366.IN1 E$367.Q4 E$367.VCC E$368.IN2
S$30: E$21.IN1 E$31.IN2 E$153.GND
S$31: E$4.4!S E$12.A
S$32: E$4.VCC E$11.A
S$33: E$4.4Q E$5.A
S$34: E$346.Q11
S$35: E$4.2!R E$4.2!S E$344.IN2
S$37: E$1.GND E$310.IN1 E$311.IN2
S$38: E$1.OE E$312.Q4
S$39: E$307.Q0 E$312.Q0
S$40: E$153.OE E$346.Q4
S$41: E$1.4Q
S$42: E$4.OE E$347.Q4
S$43: E$21.IN2 E$153.2!R E$153.2!S
S$44: E$346.Q10 E$349.IN1 E$355.IN1
S$45: E$5.K E$245.K E$367.Q10
S$46: E$346.Q7 E$351.IN1
S$47: E$346.Q8 E$352.IN1
S$48: E$346.Q9 E$350.IN1 E$356.IN1
S$49: E$353.IN2 E$358.IN2
S$50: E$4.1!R E$4.NC E$31.IN1 E$153.1!R E$153.NC E$345.IN2 E$346.GND E$346.Q2 E$347.GND E$347.Q2 E$367.GND E$367.Q1 E$367.Q2
S$51: E$164.K E$167.K E$184.K E$187.K E$204.K
S$52: E$165.K E$255.K
S$53: E$163.K E$203.K
S$54: E$162.K E$202.K
S$55: E$161.K E$201.K
S$56: E$160.K E$200.K
S$57: E$159.K E$199.K
S$58: E$158.K E$198.K
S$59: E$157.K E$197.K
S$60: E$156.K E$196.K
S$61: E$196.A E$255.A
S$62: E$186.A E$195.A
S$63: E$176.A E$185.A
S$64: E$166.A E$175.A
S$65: E$155.VCC E$157.A
S$66: E$155.4Q E$156.A
S$67: E$155.4!S E$158.A
S$68: E$155.4!R E$159.A
S$69: E$155.1Q E$160.A
S$70: E$155.3!R E$161.A
S$71: E$155.2Q1 E$165.A
S$72: E$155.2Q E$164.A
S$73: E$155.3Q E$163.A
S$74: E$155.3!S E$162.A
S$75: E$244.K E$276.K E$367.Q9
S$76: E$225.K E$313.K E$367.Q7
S$77: E$224.K E$331.K E$367.Q8
S$78: E$346.CLOCK E$367.CLOCK
S$79: E$346.RESET E$367.RESET
S$80: E$347.Q8 E$362.IN2 E$363.IN2
S$81: E$347.Q7 E$359.IN2
S$82: E$347.Q9 E$360.IN2 E$366.IN2
S$83: E$347.Q10 E$361.IN2 E$365.IN2
S$84: E$370.2Q1 E$412.A
S$85: E$262.A
S$86: E$370.2Q E$413.A
S$87: E$329.Q9
S$88: E$270.A
S$89: E$269.A
S$90: E$268.A
S$91: E$267.A
S$92: E$205.K E$332.K E$367.Q11
S$93: E$329.Q7
S$94: E$275.A
S$95: E$274.A
S$96: E$273.A
S$97: E$272.A
S$98: E$4.GND E$344.IN1 E$345.IN1
S$99: E$329.Q8
S$100: E$280.A
S$101: E$279.A
S$102: E$278.A
S$103: E$277.A
S$104: E$347.Q11 E$369.IN1
S$105: E$347.Q0
S$106: E$285.A
S$107: E$284.A
S$108: E$283.A
S$109: E$282.A
S$110: E$281.A
S$111: E$307.RESET E$312.RESET
S$112: E$290.A
S$113: E$289.A
S$114: E$288.A
S$115: E$287.A
S$116: E$286.A
S$117: E$347.CLOCK
S$118: E$295.A
S$119: E$294.A
S$120: E$293.A
S$121: E$292.A
S$122: E$291.A
S$123: E$307.CLOCK E$312.CLOCK
S$124: E$300.A
S$125: E$299.A
S$126: E$298.A
S$127: E$297.A
S$128: E$296.A
S$129: E$312.Q8
S$130: E$305.A
S$131: E$304.A
S$132: E$303.A
S$133: E$302.A
S$134: E$301.A
S$135: E$306.4Q
S$136: E$347.RESET
S$137: E$370.3Q E$403.A
S$138: E$312.Q7
S$139: E$312.Q9
S$140: E$312.Q10
S$141: E$307.Q10
S$142: E$307.Q9
S$143: E$307.Q7
S$144: E$307.Q8
S$145: E$370.3!S E$380.A
S$146: E$370.3!R E$378.A
S$147: E$370.1Q E$377.A
S$148: E$370.4!R E$374.A
S$149: E$370.4!S E$373.A
S$150: E$370.VCC E$372.A
S$151: E$370.4Q E$371.A
S$152: E$370.OE E$421.Q4
S$153: E$422.2Q1 E$464.A
S$154: E$422.2Q E$465.A
S$155: E$422.3Q E$455.A
S$156: E$422.3!S E$432.A
S$157: E$422.3!R E$430.A
S$158: E$329.GND E$329.Q1 E$329.Q2
S$159: E$422.1Q E$429.A
S$160: E$422.4!R E$426.A
S$161: E$422.4!S E$425.A
S$162: E$422.VCC E$424.A
S$163: E$422.4Q E$423.A
S$164: E$422.OE E$475.Q4
S$165: E$370.GND E$476.IN1 E$477.IN2
S$166: E$370.2!R E$370.2!S E$476.IN2
S$167: E$370.1!S E$421.VCC E$422.1!S E$475.VCC E$483.IN2 E$485.IN2 E$486.IN1 E$487.IN1 E$492.IN1 E$493.IN1 E$494.IN1 E$495.IN1 E$496.Q4 E$496.VCC E$497.IN2
S$168: E$421.Q11
S$169: E$421.Q10 E$478.IN1 E$484.IN1
S$170: E$421.Q7 E$480.IN1
S$171: E$421.Q8 E$481.IN1
S$172: E$421.Q9 E$479.IN1 E$485.IN1
S$173: E$482.IN2 E$487.IN2
S$174: E$408.K E$442.K E$496.Q9
S$175: E$391.K E$443.K E$496.Q7
S$176: E$390.K E$460.K E$496.Q8
S$177: E$475.Q8 E$491.IN2 E$492.IN2
S$178: E$475.Q7 E$488.IN2
S$179: E$475.Q9 E$489.IN2 E$495.IN2
S$180: E$475.Q10 E$490.IN2 E$494.IN2
S$181: E$371.K E$461.K E$496.Q11
S$182: E$409.K E$423.K E$496.Q10
S$183: E$370.1!R E$370.NC E$421.GND E$421.Q2 E$422.1!R E$422.NC E$474.IN2 E$475.GND E$475.Q2 E$477.IN1 E$496.GND E$496.Q1 E$496.Q2
S$184: E$421.Q0 E$496.Q0
S$185: E$421.CLOCK E$496.CLOCK
S$186: E$421.RESET E$496.RESET
S$187: E$422.2!R E$422.2!S E$473.IN2
S$188: E$422.GND E$473.IN1 E$474.IN1
S$189: E$475.Q11 E$498.IN1
S$190: E$475.Q0
S$191: E$475.CLOCK
S$192: E$475.RESET
S$193: E$613.OE E$614.Q4
S$194: E$613.2!R E$613.2!S E$615.IN1
S$195: E$509.K E$572.K E$613.2Q1
S$196: E$613.GND E$615.IN2 E$616.IN1
S$197: E$617.GND E$617.Q2
S$198: E$504.K E$544.K E$599.3!R
S$199: E$505.K E$549.K E$599.3!S
S$200: E$506.K E$550.K E$599.3Q
S$201: E$507.K E$555.K E$599.2Q
S$202: E$508.K E$573.K E$599.2Q1
S$204: E$617.RESET
S$205: E$617.CLOCK
S$206: E$514.A E$563.A E$617.Q9
S$207: E$513.K E$568.K
S$208: E$613.1!S E$614.VCC E$617.Q4 E$617.VCC
S$209: E$529.A
S$210: E$528.A E$530.A E$617.Q8
S$211: E$575.K E$583.K E$613.VCC
S$212: E$509.A E$534.A E$617.Q11
S$213: E$503.K E$543.K E$599.1Q
S$214: E$502.K E$538.K E$599.4!R
S$215: E$501.K E$537.K E$599.4!S
S$216: E$500.K E$533.K E$599.VCC
S$217: E$499.K E$534.K E$599.4Q
S$218: E$613.1!R E$613.NC E$614.GND E$614.Q2 E$616.IN2
S$219: E$617.Q0
S$220: E$560.A E$617.Q7
S$221: E$499.A E$572.A E$617.Q10
S$223: E$599.OE E$600.Q4
S$224: E$599.GND E$601.IN1
S$225: E$599.2!R E$599.2!S E$601.IN2
S$226: E$599.1!S E$600.VCC E$608.IN2 E$610.IN2 E$611.IN1 E$612.IN1
S$227: E$600.Q11
S$228: E$600.Q10 E$603.IN1 E$609.IN1
S$229: E$600.Q7 E$605.IN1
S$230: E$600.Q8 E$606.IN1
S$231: E$600.Q9 E$604.IN1 E$610.IN1
S$232: E$607.IN2 E$612.IN2
S$233: E$599.1!R E$599.NC E$600.GND E$600.Q2
S$234: E$600.Q0 E$614.Q0
S$235: E$600.CLOCK E$614.CLOCK
S$236: E$600.RESET E$614.RESET
S$241: E$510.K E$571.K E$613.2Q
S$242: E$511.K E$570.K E$613.3Q
S$243: E$512.K E$569.K E$613.3!S
S$244: E$613.3!R
S$246: E$578.K E$586.K E$613.1Q
S$247: E$577.K E$585.K E$613.4!R
S$248: E$576.K E$584.K E$613.4!S
S$250: E$574.K E$582.K E$613.4Q